# Altium PCB USB Wi-Fi.PcbDoc (part 1 of 2)
Units mm, origin at the board's own origin, x right, y up, seen from the top; angles counter-clockwise.
Board outline 24.6 x 61.64 mm, 2 copper layers (Top, Bottom), stack 1.535 mm thick; 80 components, 55 nets, 291 pads, 187 vias.
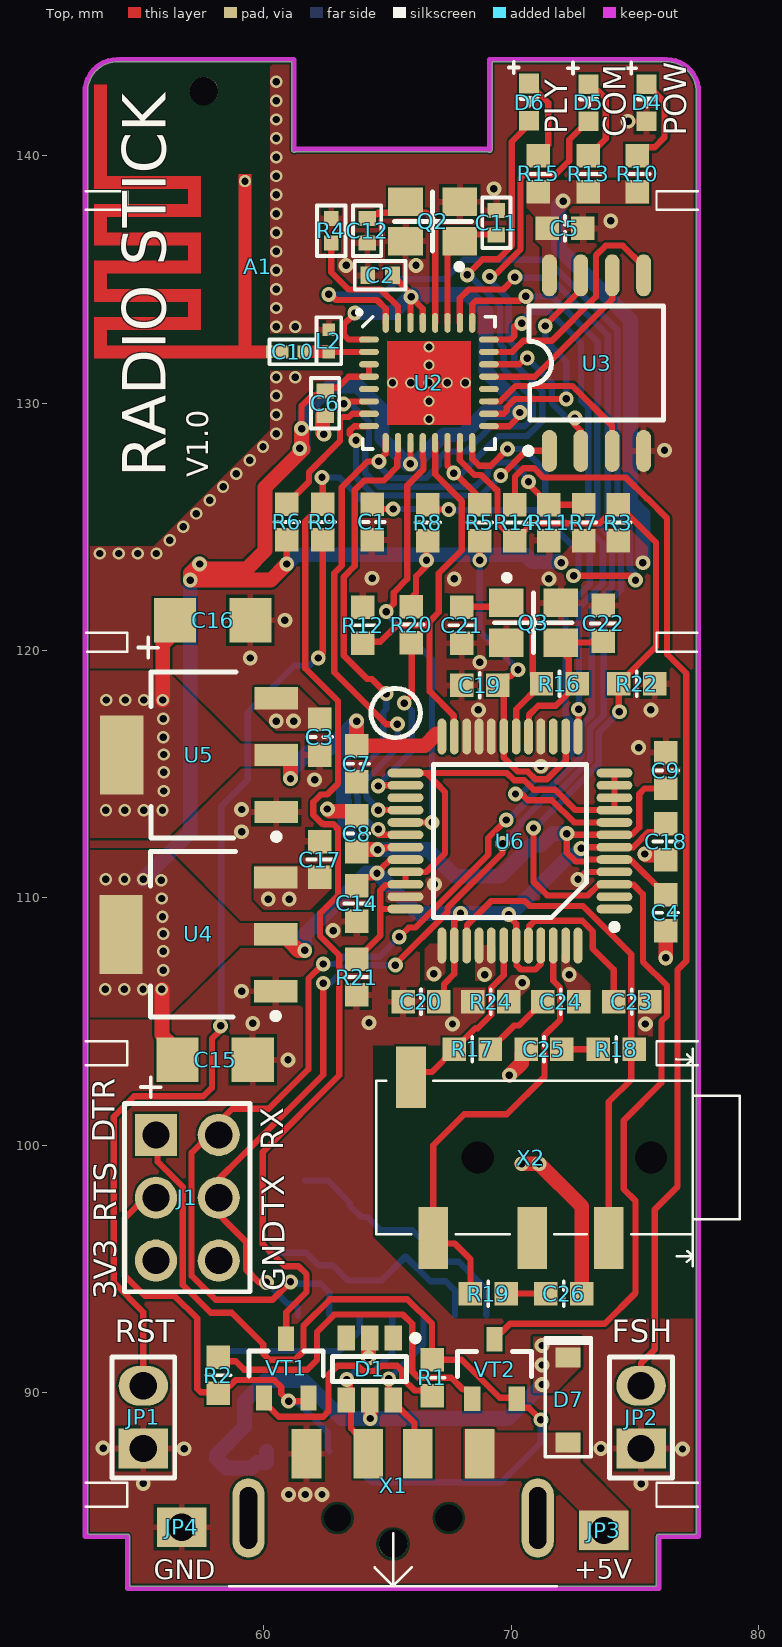
[diagram p0: Top view]
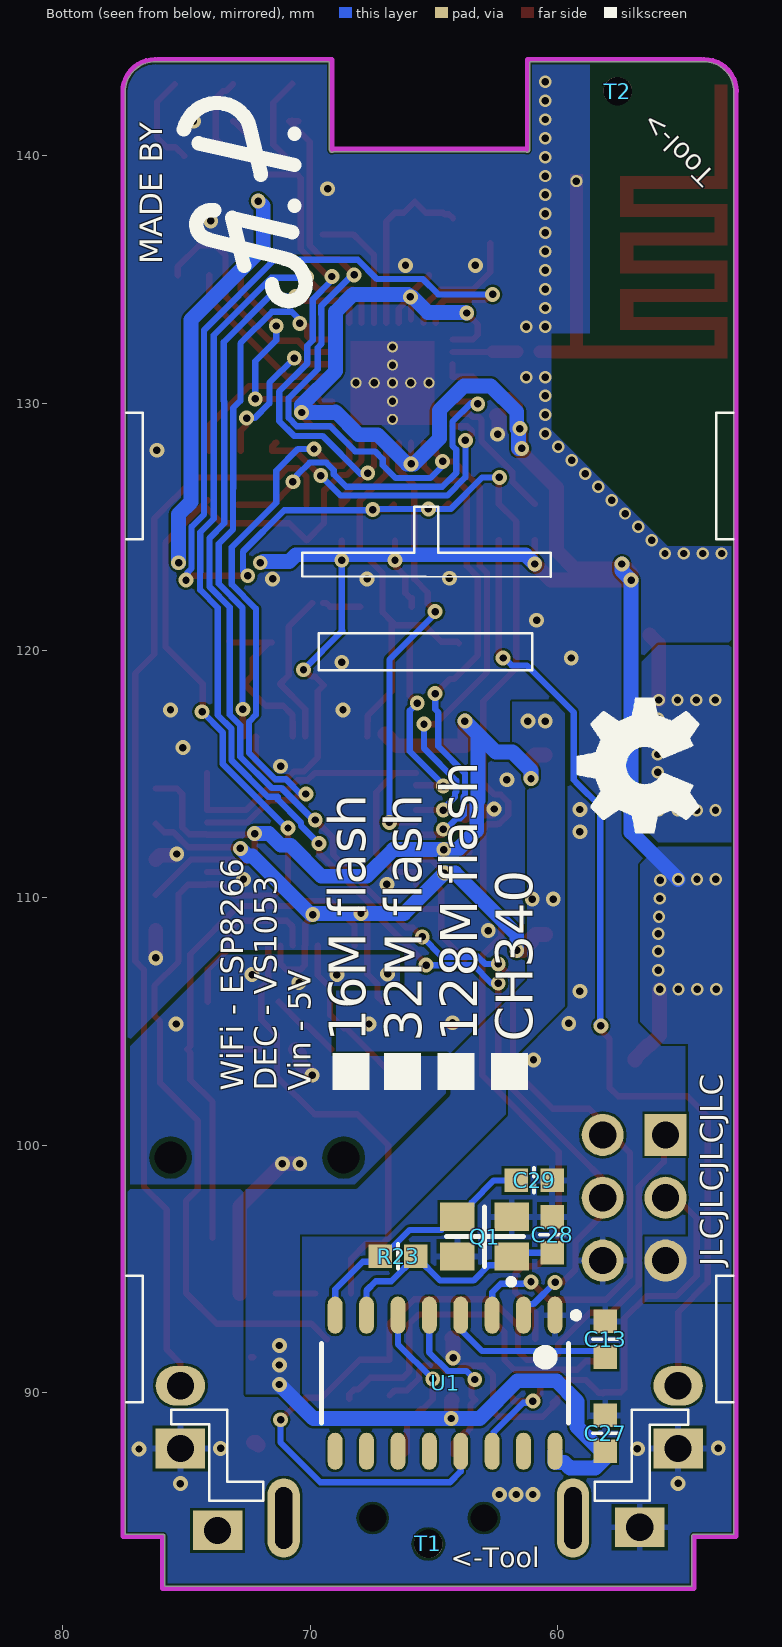
[diagram p1: Bottom view, seen from below]
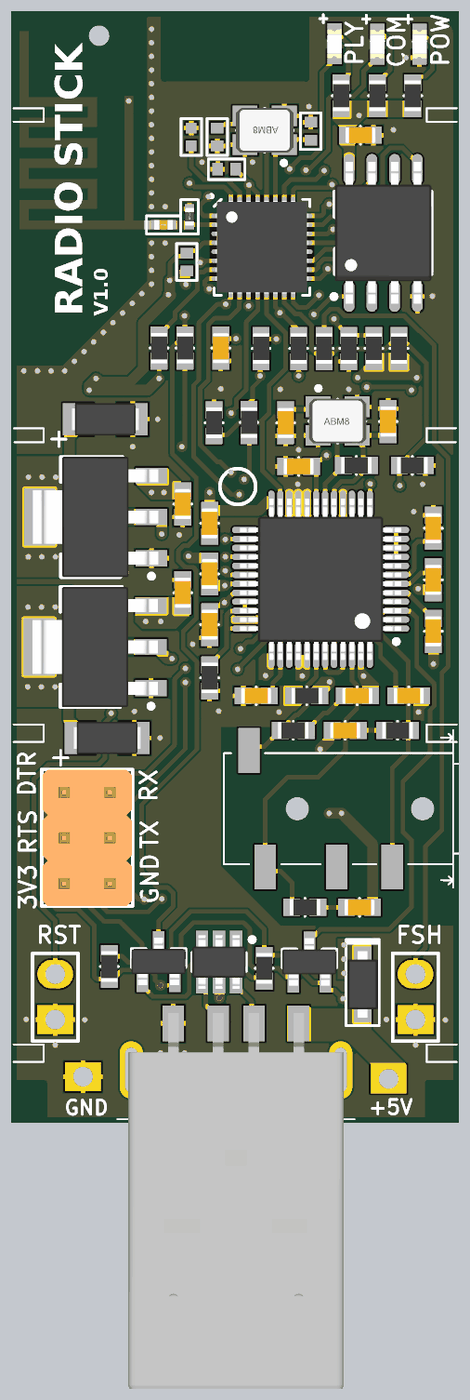
[diagram p3: 3D render of the assembled board from above, using the file's embedded part models]
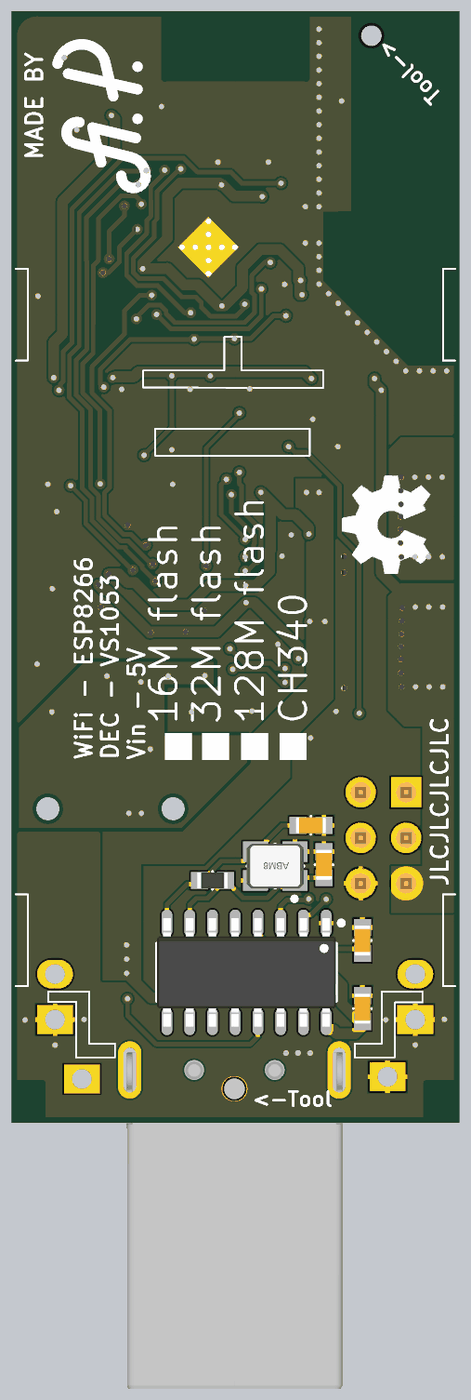
[diagram p4: 3D render of the assembled board from below, using the file's embedded part models]

## Layer stack, top to bottom
Top Solder: solder mask 0.0203, Solder Resist, Dk 3.8
Top: signal copper 0.035
Prepreg1: prepreg 0.2, PP-006, Dk 4.6
Core: dielectric 1.065, FR-4, Dk 4.6
Prepreg2: prepreg 0.2, PP-006, Dk 4.6
Bottom: signal copper 0.035
Bottom Solder: solder mask 0.0203, Solder Resist, Dk 3.8

## Board outline
52.875,84.275 54.475,84.275 cw(c54.475,84.175) 54.575,84.175 54.575,82.175 75.875,82.175 75.875,84.175 cw(c75.975,84.175) 75.975,84.275 77.475,84.275 77.475,142.696 ccw(c76.275,142.6) 76.275,143.803 cw(c76.275,143.904) 76.228,143.815 cw(c76.175,143.9) 76.175,143.8 69.225,143.8 69.225,140.25 cw(c69.125,140.25) 69.059,140.175 61.291,140.175 cw(c61.225,140.25) 61.125,140.25 61.125,143.8 54.175,143.8 cw(c54.175,143.9) 54.122,143.815 cw(c54.075,143.904) 54.075,143.803 ccw(c54.075,142.6) 52.875,142.696

## Design rules (kind name [scope] priority, off if disabled: settings)
Clearance PolyClearance [(InNamedPolygon('Bottom Layer4-AGND'))] p1: gap=0.2 ignorepadtopadclearanceinfootprint=TRUE
Clearance PadToPad [(InPadClass('All Pads')) vs (InPadClass('All Pads'))] p2: gap=0.127 ignorepadtopadclearanceinfootprint=TRUE
Clearance Ant [InComponent('A1') vs IsComponent] p3: gap=0 ignorepadtopadclearanceinfootprint=FALSE
Clearance [All] p4: gap=0.1 ignorepadtopadclearanceinfootprint=TRUE
ComponentClearance AntToOther [InComponent('A1','T1','T2')] p1: gap=0 collisioncheckmode=3 verticalgap=0 showdistances=FALSE
ComponentClearance [All] p2: gap=0.254 collisioncheckmode=3 verticalgap=0.254 showdistances=FALSE
HoleSize [All] p1: absolutevalues=TRUE maxlimit=6.3 minlimit=0.2 maxpercent=80.000 minpercent=20.000
MinimumSolderMaskSliver [All] p1: minsoldermaskwidth=0.2
PolygonConnect PolyToThermal [InComponent('C26','C25','U2','A1','U6','C23','C24','R24')] p1: connectstyle=Direct reliefconductorwidth=0.254 reliefentries=4 polygonreliefangle="90 Angle" airgapwidth=0.254
PolygonConnect PowerConnect [InNetClass('PowerNets')] p2: connectstyle=Direct reliefconductorwidth=0.254 reliefentries=4 polygonreliefangle="90 Angle" airgapwidth=0.254
PolygonConnect [All] p3: connectstyle=Relief reliefconductorwidth=0.254 reliefentries=4 polygonreliefangle="90 Angle" airgapwidth=0.127
RoutingVias [All] p1: holewidth=0.3 width=0.6 viastyle="Through Hole" minholewidth=0.3 minwidth=0.5 maxholewidth=6.3 maxwidth=0.6 useviatemplates=TRUE viatemplateguid#1={ECB47281-253E-4457-A08C-9E4C9EE73178} viatemplatename#1=ShieldingVia
ShortCircuit [InNet('NetA1_1') vs InNet('GND')] p1: allowed=TRUE
SilkToSilkClearance [All] p1: silktosilkclearance=0.1
SilkToSolderMaskClearance [IsPad] p1: minsilkscreentomaskgap=0.1 clearancetoexposedcopper=TRUE
SolderMaskExpansion [All] p1: expansion=0.1
Width [All] p1: maxlimit=0.6 minlimit=0.254 preferedwidth=0.254
24 further rules are at their usual default settings.

## Classes and differential pairs
net class PowerNets: 1v8 3v3A +5V NetD7_1

## Components (designator, comment, footprint, x,y, rotation, side; value= is the part's Value field where it differs from the comment)
A1 "AN91445" "MIFA 2.4GHZ" 65.33,131.821 r90 top
C1 "100n" "0603 CAP" 64.375,125.2 r90 top
C2 "1uF" 0402 64.7,135.175 r0 top
C3 "100n" "0603 CAP" 62.25,116.5 r90 top
C4 "100n" "0603 CAP" 76.25,109.4 r90 top
C5 "100n" "0603 CAP" 72.175,137.075 r0 top
C6 "1uF" 0402 62.475,130 r90 top
C7 "100n" "0603 CAP" 63.75,115.425 r90 top
C8 "100n" "0603 CAP" 63.75,112.6 r270 top
C9 "100n" "0603 CAP" 76.25,115.15 r270 top
C10 "5.6p" "CAP 0402" 61.175,132.075 r0 top
C11 "6.8p" 0402 69.4,137.3 r270 top
C12 "6.8p" 0402 64.175,136.975 r90 top
C13 "10n" "0603 CAP" 58.075,92.15 r270 bottom
C14 "100n" "0603 CAP" 63.75,109.775 r90 top
C15 "10uF" "CAP 1206" 58.025,103.45 r180 top
C16 "10uF" "CAP 1206" 57.925,121.225 r180 top
C17 "100n" "0603 CAP" 62.25,111.55 r270 top
C18 "100n" "0603 CAP" 76.25,112.275 r90 top
C19 "100n" "0603 CAP" 68.725,118.6 r0 top
C20 "100n" "0603 CAP" 66.35,105.8 r0 top
C21 "33p" "0603 CAP" 68,121.025 r90 top
C22 "33p" "0603 CAP" 73.725,121.1 r270 top
C23 "1uF" "0603 CAP" 74.875,105.8 r180 top
C24 "47nF" "0603 CAP" 72,105.8 r180 top
C25 "10n" "0603 CAP" 71.325,103.875 r0 top
C26 "10n" "0603 CAP" 72.125,94 r180 top
C27 "100n" "0603 CAP" 58.075,88.35 r270 bottom
C28 "22p" "0603 CAP" 60.225,96.375 r270 bottom
C29 "22p" "0603 CAP" 60.95,98.575 r0 bottom
D1 "SRV05-4-P-T7" SOT-23-6 64.275,90.95 r270 top
D4 "Red" "LED 0603" 75.475,142.15 r90 top
D5 "Blue" "LED 0603" 73.125,142.15 r90 top
D6 "Green" "LED 0603" 70.725,142.175 r90 top
D7 "B5819W" SOD-123 72.3,89.7 r270 top
J1 "HDR 2x3" "HDR 2X3 2.54MM" 55.635,100.415 r0 top
JP1 "R" HDR_FEM_1X2_2.54MM 55.125,87.735 r180 top
JP2 "F" HDR_FEM_1X2_2.54MM 75.25,87.735 r180 top
JP3 "+5V" HDR_FEM_1X1_2.54MM 73.75,84.425 r0 top
JP4 "GND" HDR_FEM_1X1_2.54MM 56.675,84.55 r0 top
L2 "NC" "IND 0402" 62.625,132.525 r270 top
Q1 "12MHZ" ABM8W 62.95,96.3 r0 bottom
Q2 "26MHZ" ABM8W 66.825,137.35 r180 top
Q3 "12.228MHZ" ABM8W 70.9,121.125 r0 top
R1 "12K" "0603 RES" 66.8,90.6 r90 top
R2 "12K" "0603 RES" 58.15,90.7 r270 top
R3 "12K" "0603 RES" 74.325,125.175 r90 top
R4 "12K" "0402 RES" 62.725,136.975 r90 top
R5 "12K" "0603 RES" 68.725,125.175 r90 top
R6 "12K" "0603 RES" 60.925,125.2 r90 top
R7 "100k" "0603 RES" 72.925,125.175 r270 top
R8 "12K" "0603 RES" 66.625,125.175 r90 top
R9 "470R" "0603 RES" 62.375,125.2 r90 top
R10 "1k" "0603 RES" 75.1,139.275 r270 top
R11 "100k" "0603 RES" 71.525,125.175 r90 top
R12 "12K" "0603 RES" 64,121.025 r270 top
R13 "1k" "0603 RES" 73.125,139.275 r90 top
R14 "470R" "0603 RES" 70.15,125.175 r90 top
R15 "1k" "0603 RES" 71.1,139.275 r90 top
R16 "1M" "0603 RES" 71.95,118.65 r0 top
R17 "22R" "0603 RES" 68.425,103.875 r180 top
R18 "22R" "0603 RES" 74.25,103.875 r0 top
R19 "22R" "0603 RES" 69.075,94 r180 top
R20 "100k" "0603 RES" 65.95,121.05 r90 top
R21 "100k" "0603 RES" 63.75,106.8 r90 top
R22 "100k" "0603 RES" 75.075,118.65 r180 top
R23 "1M" "0603 RES" 66.45,95.5 r0 bottom
R24 "0R" "0603 RES" 69.175,105.8 r0 top
T1 "Tooling hole" TOOLING 65.225,83.875 r180 bottom
T2 "Tooling hole" TOOLING 57.575,142.625 r180 bottom
U1 "CH340G" SOP-16 64.55,90.375 r270 bottom
U2 "ESP8266EX" "QFN-32 THERMAL" 66.675,130.825 r0 top
U3 "W25Q128JVSIQ" "SOIC-8 208-MIL" 73.45,131.625 r90 top
U4 "AMS1117-3.3" SOT233-3 57.35,108.525 r180 top
U5 "BL1117-18CX" SOT233-3 57.375,115.775 r180 top
U6 "VS1053B-L" LQFP-48 69.95,112.3 r180 top
VT1 "S8050" SOT-23 60.9,90.975 r90 top
VT2 "S8050" SOT-23 69.325,90.95 r90 top
X1 "480372100" USB2.0-A 65.225,84.925 r0 top
X2 "PJ-320D-X" "3.5MM JACK" 77.25,99.5 r180 top

## Footprints (in the part's own frame and the unit in brackets; to place one, negate y for a bottom-side part, rotate by r counter-clockwise, add the part's x,y. Pads: shape width x height; smd on the part's side, far side on the other; paste and mask are expansions set on the pad)
"3.5MM JACK" [mm]
  rect 1.2x2.5 smd: 1(11.3,-3.25) 2(3.3,3.25) 3(6.4,3.25) 4(10.4,3.25)
  round 0 hole 1.3 unplated paste+0 mask+0: ""(1.6,0) ""(8.6,0)
  silkscreen extent -2,-4.4 12.7,4.4, body extent -2,-3 12.6,3, height 5
0402 [mm] "Chip Capacitor, 2-Leads, Body 1.00x0.50mm, IPC Medium Density"
  rect 0.6x0.7 smd: 1(-0.5,0) 2(0.5,0)
  silkscreen extent -1.02,-0.58 1.02,0.58, body extent -0.53,-0.28 0.53,0.27, height 0.55
"0402 RES" [mm]
  rect 0.6x0.6 smd mask+0.1: 1(-0.5,0) 2(0.5,0)
  silkscreen extent -1.02,-0.58 1.02,0.58, body extent -0.53,-0.28 0.53,0.27, height 0.35
"0603 CAP" [mm]
  rect 0.95x0.95 smd: 1(-0.725,0) 2(0.725,0)
  silkscreen extent 0,-0.5 0,0.5, body extent -0.85,-0.45 0.85,0.45, height 0.9
"0603 RES" [mm]
  rect 0.95x0.95 smd: 1(-0.725,0) 2(0.725,0)
  silkscreen extent 0,-0.5 0,0.5, body extent -0.85,-0.45 0.85,0.45, height 0.55
ABM8W [mm] "4-Leads, Body 2.50x3.20mm, Pitch 2.20mm, IPC Medium Density"
  rect 1.4x1.15 smd: 1(-1.1,0.8) 2(1.1,0.8) 3(1.1,-0.8) 4(-1.1,-0.8)
  silkscreen extent -1.58,-1.2 1.55,1.86, body extent -1.6,-1.24 1.6,1.24, height 0.8
"CAP 0402" [mm]
  rect 0.52x0.52 smd mask+0.05: 1(-0.45,0) 2(0.45,0)
  silkscreen extent -0.95,-0.5 0.95,0.5, body extent -0.52,-0.28 0.52,0.28, height 0.56
"CAP 1206" [mm] "Molded Capacitor, 2-Leads, Body 3.20x1.60mm, IPC Medium Density"
  rect 1.7x1.8 smd: 1(1.525,0) 2(-1.525,0)
  silkscreen extent 2.2,0.7 3,1.51, body extent -1.92,-0.9 1.92,0.9, height 1.8
"HDR 2X3 2.54MM" [mm]
  rect 1.7x1.7 hole 1.1: 1(0,0)
  round 1.7 hole 1.1: 2(2.54,0) 3(0,-2.54) 4(2.54,-2.54) 5(0,-5.08) 6(2.54,-5.08)
  silkscreen extent -1.27,-6.34 3.81,1.27, body extent -1.23,-6.35 3.77,1.27, height 8.01
HDR_FEM_1X1_2.54MM [mm]
  rect 2x1.6 hole 1.1: 1(0,0)
HDR_FEM_1X2_2.54MM [mm]
  rect 2x1.6 hole 1.1: 1(0,0)
  oval 2x1.6 hole 1.1: 2(0,-2.54)
  silkscreen extent -1.27,-3.7 1.27,1.2
"IND 0402" [mm]
  rect 0.52x0.52 smd mask+0.05: 1(-0.45,0) 2(0.45,0)
  silkscreen extent -0.95,-0.5 0.95,0.5, body extent -0.5,-0.25 0.5,0.25, height 0.51
"LED 0603" [mm]
  rect 0.8x0.8 smd: 1(0.75,0) 2(-0.75,0)
  silkscreen extent -0.13,-0.33 1.63,0.82, body extent -0.8,-0.4 0.8,0.4, height 0.8
LQFP-48 [mm] "LQFP, 48-Leads, Body 7.00x7.00mm, Pitch 0.50mm, IPC Medium Density"
  oval 1.45x0.35 smd: 1(-4.225,2.75) 2(-4.225,2.25) 3(-4.225,1.75) 4(-4.225,1.25) 5(-4.225,0.75) 6(-4.225,0.25) 7(-4.225,-0.25) 8(-4.225,-0.75) 9(-4.225,-1.25) 10(-4.225,-1.75) 11(-4.225,-2.25) 12(-4.225,-2.75) 25(4.225,-2.75) 26(4.225,-2.25) 27(4.225,-1.75) 28(4.225,-1.25) 29(4.225,-0.75) 30(4.225,-0.25) 31(4.225,0.25) 32(4.225,0.75) 33(4.225,1.25) 34(4.225,1.75) 35(4.225,2.25) 36(4.225,2.75)
  oval 0.35x1.45 smd: 13(-2.75,-4.225) 14(-2.25,-4.225) 15(-1.75,-4.225) 16(-1.25,-4.225) 17(-0.75,-4.225) 18(-0.25,-4.225) 19(0.25,-4.225) 20(0.75,-4.225) 21(1.25,-4.225) 22(1.75,-4.225) 23(2.25,-4.225) 24(2.75,-4.225) 37(2.75,4.225) 38(2.25,4.225) 39(1.75,4.225) 40(1.25,4.225) 41(0.75,4.225) 42(0.25,4.225) 43(-0.25,4.225) 44(-0.75,4.225) 45(-1.25,4.225) 46(-1.75,4.225) 47(-2.25,4.225) 48(-2.75,4.225)
  silkscreen extent -4.35,-3.1 3.1,3.6, body extent -4.5,-4.5 4.5,4.5, height 1.85
"MIFA 2.4GHZ" [mm] "AN91445"
  rect 0.508x0.344 smd paste+0 mask+0: 1(0.254,5.08)
  round 0.5 hole 0.3: 2(7.164,6.094)
  Top region: 0,5.08 0.508,5.08 0.508,5.842 7.442,5.842 7.442,6.35 0.508,6.35 0.508,11.684 1.143,11.684 1.143,7.874 2.794,7.874 2.794,11.684 3.429,11.684 3.429,7.874 5.08,7.874 5.08,11.684 5.715,11.684 5.715,7.874 7.366,7.874 7.366,11.684 11.049,11.684 11.049,12.192 6.858,12.192 6.858,8.382 6.223,8.382 6.223,12.192 4.572,12.192 4.572,8.382 3.937,8.382 3.937,12.192 2.286,12.192 2.286,8.382 1.651,8.382 1.651,12.192 0,12.192
  Top region: -0.004,5.074
"QFN-32 THERMAL" [mm] "QFN, 32-Leads, Body 5.00x5.00mm, Pitch 0.50mm, Thermal Pad 3.70x3.70mm, IPC Medium Density"
  oval 0.8x0.25 smd mask+0.05: 1(-2.425,1.75) 2(-2.425,1.25) 3(-2.425,0.75) 4(-2.425,0.25) 5(-2.425,-0.25) 6(-2.425,-0.75) 7(-2.425,-1.25) 8(-2.425,-1.75) 17(2.425,-1.75) 18(2.425,-1.25) 19(2.425,-0.75) 20(2.425,-0.25) 21(2.425,0.25) 22(2.425,0.75) 23(2.425,1.25) 24(2.425,1.75)
  oval 0.25x0.8 smd mask+0.05: 9(-1.75,-2.425) 10(-1.25,-2.425) 11(-0.75,-2.425) 12(-0.25,-2.425) 13(0.25,-2.425) 14(0.75,-2.425) 15(1.25,-2.425) 16(1.75,-2.425) 25(1.75,2.425) 26(1.25,2.425) 27(0.75,2.425) 28(0.25,2.425) 29(-0.25,2.425) 30(-0.75,2.425) 31(-1.25,2.425) 32(-1.75,2.425)
  round 0.45 hole 0.3 mask+0: 33(-1.475,0) 33(-0.738,0) 33(0,-1.475) 33(0,-0.744) 33(0,0) 33(0,0.719) 33(0,1.45) 33(0.737,0) 33(1.475,0)
  Top region: -1.7,-1.7 1.7,-1.7 1.7,1.7 -1.7,1.7
  silkscreen extent -2.85,-2.68 2.68,2.87, body extent -2.57,-2.57 2.58,2.58, height 0.9
SOD-123 [mm] "SOD, 2-Leads, Body 1.60x3.70mm, IPC Medium Density"
  rect 0.8x1 smd: 1(1.72,0) 2(-1.72,0)
  silkscreen extent -2.5,-0.93 2.3,0.92, body extent -1.85,-0.85 1.85,0.85, height 3.25
"SOIC-8 208-MIL" [mm] "SOIC, 8-Leads, Body 5.28x5.28mm, Pitch 1.27mm, IPC Medium Density"
  oval 1.7x0.6 smd: 1(-3.55,1.905) 2(-3.55,0.635) 3(-3.55,-0.635) 4(-3.55,-1.905) 5(3.55,-1.905) 6(3.55,-0.635) 7(3.55,0.635) 8(3.55,1.905)
  silkscreen extent -3.67,-2.7 2.3,2.88, body extent -3.95,-2.7 3.95,2.7, height 2.16
SOP-16 [mm] "SOP, 16-Leads, Body 9.90x3.90mm, Pitch 1.27mm, IPC Medium Density"
  oval 1.5x0.6 smd: 1(-2.75,4.445) 2(-2.75,3.175) 3(-2.75,1.905) 4(-2.75,0.635) 5(-2.75,-0.635) 6(-2.75,-1.905) 7(-2.75,-3.175) 8(-2.75,-4.445) 9(2.75,-4.445) 10(2.75,-3.175) 11(2.75,-1.905) 12(2.75,-0.635) 13(2.75,0.635) 14(2.75,1.905) 15(2.75,3.175) 16(2.75,4.445)
  silkscreen extent -2.87,-5 1.6,5.42, body extent -3.03,-5 3.03,5, height 1.75
SOT233-3 [mm] "SOT223, 4-Leads, Body 6.50x7.00mm (avg), Pitch 2.30mm, IPC Medium Density"
  rect 1.75x0.9 smd: 1(-3.125,2.3) 2(-3.125,0) 3(-3.125,-2.3)
  rect 1.75x3.2 smd: 4(3.125,0)
  silkscreen extent -3.25,-3.35 1.94,3.42, body extent -3.5,-3.35 3.5,3.35, height 1.8
SOT-23 [mm] "SOT23, 3-Leads, Body 2.92x2.37mm, Pitch 0.90mm, IPC Medium Density"
  rect 1x0.65 smd: 1(-1.2,0.9) 2(-1.2,-0.9) 3(1.2,0)
  silkscreen extent -0.3,-1.5 0.7,1.5, body extent -1.32,-1.52 1.32,1.52, height 1.12
SOT-23-6 [mm] "SOT23, 6-Leads, Body 2.90x2.80mm, Pitch 0.95mm, IPC Medium Density"
  rect 1x0.7 smd mask+0.05: 1(-1.25,0.95) 2(-1.25,0) 3(-1.25,-0.95) 4(1.25,-0.95) 5(1.25,0) 6(1.25,0.95)
  silkscreen extent -1.37,-1.5 0.5,1.98, body extent -1.5,-1.5 1.5,1.5, height 1.45
TOOLING [mm]
  oval 1.152x1.125 hole 1.152 unplated paste+1.152 mask+0.148: 1(0,0)
USB2.0-A [mm]
  rect 1.2x2 smd: 1(3.5,2.6) 2(1,2.6) 3(-1,2.6) 4(-3.5,2.6)
  oval 1.3x3.2 hole 0.7 slot 2.5 at 90 deg paste+0 mask+0: 5(5.85,0) 6(-5.85,0)
  round 0 hole 1.1 unplated paste+0 mask+0: ""(-2.25,0) ""(2.25,0)
  silkscreen extent -6.63,-2.75 6.63,-0.63, body extent -6.02,-17.77 6.03,3.18, height 2.11

## Part data
A1: library part "MIFA 2.4GHz", ComponentLink1Description=rf-layout-guidelines, ComponentLink1URL=https://www.cypress.com/documentation/application-notes/an91445-antenna-design-and-rf-layout-guidelines
C1 C3 C4 C5 C7 C8 C9 C14 C17 C18 C19 C20 C27: library part CC0603KRX7R9BB104, "MULTILAYER CERAMIC CAPACITORS MLCC - SMD/SMT 100NF 50V 0603 ROHS", LCSC Part #=C14663, Manufacturer=YAGEO, Package=0603, Category=Capacitors, Datasheet=https://datasheet.lcsc.com/szlcsc/YAGEO-CC0603KRX7R9BB104_C14663.pdf, MFR.Part #=CC0603KRX7R9BB104
C2 C6: library part CL05A105KA5NQNC, "MULTILAYER CERAMIC CAPACITORS MLCC - SMD/SMT 1UF 25V 0402 ROHS", LCSC Part #=C52923, Manufacturer="Samsung Electro-Mechanics", Package=0402, Category=Capacitors, Datasheet=https://datasheet.lcsc.com/szlcsc/Samsung-Electro-Mechanics-CL05A105KA5NQNC_C52923.pdf, MFR.Part #=CL05A105KA5NQNC
C10: library part CL05B103KB5NNNC_1, "5.6PF ±0.25PF 50V C0G 0402 MULTILAYER CERAMIC CAPACITORS MLCC - SMD/SMT ROHS", LCSC Part #=C318596, Manufacturer="Samsung Electro-Mechanics", MFR.Part #=CL05C5R6CB5NNNC, Package=0402, Category=Capacitors, ComponentLink1Description=CL05C5R6CB5NNNC_C318596.pdf, ComponentLink1URL=https://datasheet.lcsc.com/szlcsc/1811131657_Samsung-Electro-Mechanics-CL05C5R6CB5NNNC_C318596.pdf, Datasheet=https://datasheet.lcsc.com/szlcsc/1811131657_Samsung-Electro-Mechanics-CL05C5R6CB5NNNC_C318596.pdf, Library Type=Extended
C11 C12: library part 0402CG6R8C500NT, "MULTILAYER CERAMIC CAPACITORS MLCC - SMD/SMT 6.8PF 50V 0402 ROHS", LCSC Part #=C1576, Manufacturer="Guangdong Fenghua Advanced Tech", Package=0402, Category=Capacitors, Datasheet=https://datasheet.lcsc.com/szlcsc/Guangdong-Fenghua-Advanced-Tech-0402CG6R8C500NT_C1576.pdf, MFR.Part #=0402CG6R8C500NT
C13 C25 C26: library part 0603B103K500NT, "MULTILAYER CERAMIC CAPACITORS MLCC - SMD/SMT 10NF 50V 0603 ROHS", LCSC Part #=C57112, Manufacturer="Guangdong Fenghua Advanced Tech", Package=0603, Category=Capacitors, Datasheet=https://datasheet.lcsc.com/szlcsc/Guangdong-Fenghua-Advanced-Tech-0603B103K500NT_C57112.pdf, MFR.Part #=0603B103K500NT
C15 C16: library part TAJA106K016RNJ, "TANTALUM CAPACITORS 10UF 16V CASE-A_3216 ROHS", LCSC Part #=C7171, Manufacturer=AVX, Package=CASE-A_3216, Category=Capacitors, Datasheet=https://datasheet.lcsc.com/szlcsc/AVX-TAJA106K016RNJ_C7171.pdf, MFR.Part #=TAJA106K016RNJ
C21 C22: library part CL10C330JB8NNNC, "MULTILAYER CERAMIC CAPACITORS MLCC - SMD/SMT 33PF 50V 0603 ROHS", LCSC Part #=C1663, Manufacturer="Samsung Electro-Mechanics", Package=0603, Category=Capacitors, Datasheet=https://datasheet.lcsc.com/szlcsc/Samsung-Electro-Mechanics-CL10C330JB8NNNC_C1663.pdf, MFR.Part #=CL10C330JB8NNNC
C23: library part CL10A105KB8NNNC, "MULTILAYER CERAMIC CAPACITORS MLCC - SMD/SMT 1UF 50V 0603 ROHS", LCSC Part #=C15849, Manufacturer="Samsung Electro-Mechanics", Package=0603, Category=Capacitors, Datasheet=https://datasheet.lcsc.com/szlcsc/Samsung-Electro-Mechanics-CL10A105KB8NNNC_C15849.pdf, MFR.Part #=CL10A105KB8NNNC
C24: library part CL10B473KB8NNNC, "MULTILAYER CERAMIC CAPACITORS MLCC - SMD/SMT 47NF 50V 0603 ROHS", LCSC Part #=C1622, Manufacturer="Samsung Electro-Mechanics", Package=0603, Category=Capacitors, Datasheet=https://datasheet.lcsc.com/szlcsc/Samsung-Electro-Mechanics-CL10B473KB8NNNC_C1622.pdf, MFR.Part #=CL10B473KB8NNNC
C28 C29: library part CL10C220JB8NNNC, "MULTILAYER CERAMIC CAPACITORS MLCC - SMD/SMT 22PF 50V 0603 ROHS", LCSC Part #=C1653, Manufacturer="Samsung Electro-Mechanics", Package=0603, Category=Capacitors, Datasheet=https://datasheet.lcsc.com/szlcsc/Samsung-Electro-Mechanics-CL10C220JB8NNNC_C1653.pdf, MFR.Part #=CL10C220JB8NNNC
D1: "TVS SOT-23-6 ROHS", LCSC Part #=C85364, Manufacturer="ProTek Devices", Package=SOT-23-6L, Category=Diodes, ComponentLink1Description=SRV05-4-P-T7_C85364, ComponentLink1URL=https://datasheet.lcsc.com/szlcsc/ProTek-Devices-SRV05-4-P-T7_C85364.pdf, Datasheet=https://datasheet.lcsc.com/szlcsc/ProTek-Devices-SRV05-4-P-T7_C85364.pdf, MFR.Part #=SRV05-4-P-T7
D4: library part KT-0603R, "LIGHT EMITTING DIODES (LED) RED 520~625NM 90~100MCD@20MA TOP VIEW 0603 ROHS", LCSC Part #=C2286, Manufacturer="Hubei KENTO Elec", Package=LED_0603, Category=LED's, Datasheet=https://datasheet.lcsc.com/szlcsc/Hubei-KENTO-Elec-KT-0603R_C2286.pdf, MFR.Part #=KT-0603R
D5: library part 19-217/BHC-ZL1M2RY/3T, "LIGHT EMITTING DIODES (LED) BLUE 465~475NM 11.5~28.5MCD@5MA TOP VIEW 0603 ROHS", LCSC Part #=C72041, Manufacturer="Everlight Elec", Package=LED_0603, Category=LED's, Datasheet=https://datasheet.lcsc.com/szlcsc/Everlight-Elec-19-217-BHC-ZL1M2RY-3T_C72041.pdf, MFR.Part #=19-217/BHC-ZL1M2RY/3T
D6: library part 19-217/GHC-YR1S2/3T, "LIGHT EMITTING DIODES (LED) GREEN 520~535NM 112~258MCD@20MA TOP VIEW 0603 ROHS", LCSC Part #=C72043, Manufacturer="Everlight Elec", Package=LED_0603, Category=LED's, Datasheet=https://datasheet.lcsc.com/szlcsc/Everlight-Elec-19-217-GHC-YR1S2-3T_C72043.pdf, MFR.Part #=19-217/GHC-YR1S2/3T
D7: "SCHOTTKY BARRIER DIODES (SBD) SOD-123 ROHS", LCSC Part #=C8598, Manufacturer="Changjiang Electronics Tech (CJ)", Package=SOD-123, Category=Diodes, Datasheet=https://datasheet.lcsc.com/szlcsc/Changjiang-Electronics-Tech-CJ-B5819W_C8598.pdf, MFR.Part #=B5819W
J1: library part 67997-106HLF, "CONN HEADER 6POS .100 STR 30AU", Color=Black, Current Rating=3A, Flammability Rating="UL94 V-0", Insulation Resistance=5GR, Manufacturer 1="Amphenol FCI", Max Operating Temperature=125°C, Max Voltage Rating (AC)=1.5kV, Min Operating Temperature=-65°C, Package Quantity=100, Supplier Part Number 1=609-3393-ND, Category="Headers and Wire Housings", ComponentLink1Description=https://datasheet.ciiva.com/5153/67996-222463-5153820.pdf?src-supplier=Mouser, ComponentLink1URL=https://datasheet.ciiva.com/5153/67996-222463-5153820.pdf?src-supplier=Mouser, ComponentLink2Description=https://datasheet.ciiva.com/16726/67996-16726286.pdf?src-supplier=Avnet+Europe, ComponentLink2URL=https://datasheet.ciiva.com/16726/67996-16726286.pdf?src-supplier=Avnet+Europe, ComponentLink3Description=https://datasheet.ciiva.com/722/67996-722044.pdf?src-supplier=Digi-Key, ComponentLink3URL=https://datasheet.ciiva.com/722/67996-722044.pdf?src-supplier=Digi-Key, ComponentLink4Description=https://datasheet.ciiva.com/10149/67996-10149221.pdf?src-supplier=Avnet, ComponentLink4URL=https://datasheet.ciiva.com/10149/67996-10149221.pdf?src-supplier=Avnet, ComponentLink5Description=https://datasheet.ciiva.com/46393/1876884-46393067.pdf?src-supplier=Element14, ComponentLink5URL=https://datasheet.ciiva.com/46393/1876884-46393067.pdf?src-supplier=Element14, Connector Type="Male Pin", Contact Gender=Male, Contact Material=Bronze, Contact Mating Length=0.23inch, Contact Plating=Gold,GXT, Contact Post Length=3.05mm, Depth=4.83mm, Gender=Male, Housing Color=Black, Housing Material=Thermoplastic, Lead Free="Lead Free", Length=7.62mm, Manufacturer Part Number 1=67997-106HLF, Mount="Through Hole", Number of Contacts=6, Number of Positions=6, Number of Rows=2, Orientation=Straight, Packaging=Bulk, Pitch=2.54mm, Pricing 1="1=1.78000, 10=1.61400, 100=1.38370, 500=1.15308, 1000=0.98835, 5000=0.87634, 10000=0.85657 (USD)", Radiation Hardening=No, REACH SVHC="No SVHC", RoHS=Yes, Row Spacing=0.1inch, Stock 1=1665, Supplier 1=Digi-Key, Termination="Through Hole", Voltage Rating=1.5kV
JP1 JP2: library part 68602-204HLF, "CONN HEADER VERT 2POS 2.54MM", Color=Black, Current Rating=3A, Flammability Rating="UL94 V-0", Insulation Resistance=5GR, Manufacturer 1="Amphenol FCI", Max Operating Temperature=125°C, Min Operating Temperature=-65°C, Package Quantity=100, Supplier Part Number 1=609-3369-ND, Voltage Rating=1.5kV, Category="Headers and Wire Housings", ComponentLink1Description=https://datasheet.ciiva.com/728/67996-728884.pdf?src-supplier=Digi-Key, ComponentLink1URL=https://datasheet.ciiva.com/728/67996-728884.pdf?src-supplier=Digi-Key, Connector Type="Male Pin", Contact Gender=Male, Contact Material=Bronze, Contact Mating Length=0.23inch, Contact Plating=Gold,GXT, Contact Post Length=3.81mm, Gender=Male, Housing Material=Thermoplastic, Manufacturer Part Number 1=68602-204HLF, Mount="Through Hole", Number of Contacts=4, Number of Positions=4, Number of Rows=2, Packaging=Bulk, Pitch=2.54mm, Pricing 1="1=0.34000, 10=0.31900, 100=0.22320, 500=0.19132, 1000=0.15943, 5000=0.13665, 10000=0.12754 (USD)", Radiation Hardening=No, RoHS=Yes, Row Spacing=0.1inch, Stock 1=139, Supplier 1=Digi-Key, Termination=Solder
JP3 JP4: library part 68602-101HLF, "CONN HEADER VERT 1POS 2.54MM", Color=Black, Current Rating=3A, Flammability Rating="UL94 V-0", Insulation Resistance=5GR, Manufacturer 1="Amphenol FCI", Manufacturer Part Number 1=68602-204HLF, Max Operating Temperature=125°C, Min Operating Temperature=-65°C, Package Quantity=100, Supplier Part Number 1=609-3369-ND, Voltage Rating=1.5kV, Category="Headers and Wire Housings", ComponentLink1Description=https://datasheet.ciiva.com/728/67996-728884.pdf?src-supplier=Digi-Key, ComponentLink1URL=https://datasheet.ciiva.com/728/67996-728884.pdf?src-supplier=Digi-Key, Connector Type="Male Pin", Contact Gender=Male, Contact Material=Bronze, Contact Mating Length=0.23inch, Contact Plating=Gold,GXT, Contact Post Length=3.81mm, Gender=Male, Housing Material=Thermoplastic, Mount="Through Hole", Number of Contacts=4, Number of Positions=4, Number of Rows=2, Packaging=Bulk, Pitch=2.54mm, Pricing 1="1=0.34000, 10=0.31900, 100=0.22320, 500=0.19132, 1000=0.15943, 5000=0.13665, 10000=0.12754 (USD)", Radiation Hardening=No, RoHS=Yes, Row Spacing=0.1inch, Stock 1=139, Supplier 1=Digi-Key, Termination=Solder
L2: library part "NC IND", "IND 0402 Matching"
Q1: library part X322512MSB4SI, "SMD CRYSTAL RESONATORS 12MHZ ±10PPM SMD-3225_4P ROHS", LCSC Part #=C9002, Manufacturer="Yangxing Tech", Package=SMD-3225_4P, Category=Crystals, ComponentLink1Description=X322512MSB4SI_C9002.pdf, ComponentLink1URL=https://datasheet.lcsc.com/szlcsc/Yangxing-Tech-X322512MSB4SI_C9002.pdf, Datasheet=https://datasheet.lcsc.com/szlcsc/Yangxing-Tech-X322512MSB4SI_C9002.pdf, MFR.Part #=X322512MSB4SI
Q2: library part X322526MEB4SC, "SMD CRYSTAL RESONATORS 26MHZ ±10PPM SMD-3225_4P ROHS", LCSC Part #=C23425, Manufacturer="Yangxing Tech", Package=SMD-3225_4P, Category=Crystals, Datasheet=https://datasheet.lcsc.com/szlcsc/Yangxing-Tech-X322526MEB4SC_C23425.pdf, MFR.Part #=X322526MEB4SC
Q3: library part X322512288MOB4SC, "SMD CRYSTAL RESONATORS 12.288MHZ ±10PPM SMD-3225_4P ROHS", LCSC Part #=C70567, Manufacturer="Yangxing Tech", Package=SMD-3225_4P, Category=Crystals, Datasheet=https://datasheet.lcsc.com/szlcsc/LCSC-X322512288MOB4SC_C70567.pdf, MFR.Part #=X322512288MOB4SC
R1 R2 R3 R5 R6 R8 R12: library part 0603WAF1202T5E, "CHIP RESISTOR - SURFACE MOUNT 12KOHMS ±1% 1/10W 0603 ROHS", LCSC Part #=C22790, Manufacturer="Uniroyal Elec", Package=0603, Category=Resistors, Datasheet=https://datasheet.lcsc.com/szlcsc/Uniroyal-Elec-0603WAF1202T5E_C22790.pdf, MFR.Part #=0603WAF1202T5E
R4: library part 0402WGF1202TCE, "CHIP RESISTOR - SURFACE MOUNT 12KOHMS ±1% 1/16W 0402 ROHS", LCSC Part #=C25752, Manufacturer="Uniroyal Elec", Package=0402, Category=Resistors, Datasheet=https://datasheet.lcsc.com/szlcsc/Uniroyal-Elec-0402WGF1202TCE_C25752.pdf, MFR.Part #=0402WGF1202TCE
R7 R11 R20 R21 R22: library part 0603WAF1003T5E, "CHIP RESISTOR - SURFACE MOUNT 100KOHMS ±1% 1/10W 0603 ROHS", LCSC Part #=C25803, Manufacturer="Uniroyal Elec", Package=0603, Category=Resistors, Datasheet=https://datasheet.lcsc.com/szlcsc/Uniroyal-Elec-0603WAF1003T5E_C25803.pdf, MFR.Part #=0603WAF1003T5E
R9 R14: library part 0603WAF4700T5E, "CHIP RESISTOR - SURFACE MOUNT 470OHMS ±1% 1/10W 0603 ROHS", LCSC Part #=C23179, Manufacturer="Uniroyal Elec", Package=0603, Category=Resistors, Datasheet=https://datasheet.lcsc.com/szlcsc/Uniroyal-Elec-0603WAF4700T5E_C23179.pdf, MFR.Part #=0603WAF4700T5E
R10 R13 R15: library part 0603WAF1001T5E, "CHIP RESISTOR - SURFACE MOUNT 1KOHMS ±1% 1/10W 0603 ROHS", LCSC Part #=C21190, Manufacturer="Uniroyal Elec", Package=0603, Category=Resistors, Datasheet=https://datasheet.lcsc.com/szlcsc/Uniroyal-Elec-0603WAF1001T5E_C21190.pdf, MFR.Part #=0603WAF1001T5E
R16 R23: library part 0603WAF1004T5E, "CHIP RESISTOR - SURFACE MOUNT 1MOHMS ±1% 1/10W 0603 ROHS", LCSC Part #=C22935, Manufacturer="Uniroyal Elec", Package=0603, Category=Resistors, Datasheet=https://datasheet.lcsc.com/szlcsc/Uniroyal-Elec-0603WAF1004T5E_C22935.pdf, MFR.Part #=0603WAF1004T5E
R17 R18 R19: library part 0603WAF220JT5E, "CHIP RESISTOR - SURFACE MOUNT 22OHMS ±1% 1/10W 0603 ROHS", LCSC Part #=C23345, Manufacturer="Uniroyal Elec", Package=0603, Category=Resistors, Datasheet=https://datasheet.lcsc.com/szlcsc/Uniroyal-Elec-0603WAF220JT5E_C23345.pdf, MFR.Part #=0603WAF220JT5E
R24: library part 0603WAF0000T5E, "CHIP RESISTOR - SURFACE MOUNT 0OHMS ±1% 1/10W 0603 ROHS", LCSC Part #=C21189, Manufacturer="Uniroyal Elec", Package=0603, Category=Resistors, Datasheet=https://datasheet.lcsc.com/szlcsc/Uniroyal-Elec-0603WAF0000T5E_C21189.pdf, MFR.Part #=0603WAF0000T5E
T1 T2: "For JLCPCB SMT Assembly"
U1: "USB 2MBPS 3.3V, 5V SOP-16_150MIL ROHS", LCSC Part #=C14267, Manufacturer="Jiangsu Qin Heng", Package=SOIC-16_3.9x9.9x1.27P, Category=IC's, Datasheet=https://datasheet.lcsc.com/szlcsc/Jiangsu-Qin-Heng-CH340G_C14267.pdf, MFR.Part #=CH340G
U2: "RF TRANSCEIVER ICS TXRX + MCU WIFI 802.11B/G/N/E/I 2.4GHZ 16DBM - 91DBM 2.5V~3.6V QFN-32_5X5X05P ROHS", LCSC Part #=C77967, Manufacturer="Espressif Systems", Package=QFN-32_EP_5.0x5.0x0.5P, Category=IC's, Datasheet=https://datasheet.lcsc.com/szlcsc/Espressif-Systems-ESP8266EX_C77967.pdf, Library Type=Extended, MFR.Part #=ESP8266EX
U3: "FLASH FLASH 128MB (16M X 8) SPI - DUAL/QUAD I/O SOIC-8_208MIL ROHS", LCSC Part #=C97521, Manufacturer="Winbond Elec", Package=SOIC-8_5.3x5.3x1.27P, Category=IC's, Datasheet=https://datasheet.lcsc.com/szlcsc/Winbond-Elec-W25Q128JVSIQTR_C97521.pdf, MFR.Part #=W25Q128JVSIQ
U4: "LOW DROPOUT REGULATORS(LDO) POSITIVE FIXED 1.3V @ 800MA 15V 3.3V 1A SOT-223 ROHS", LCSC Part #=C6186, Manufacturer="Advanced Monolithic Systems", Package=SOT-223, Category=IC's, ComponentLink1Description=AMS1117-3-3_C6186, ComponentLink1URL=https://datasheet.lcsc.com/szlcsc/1811201117_Advanced-Monolithic-Systems-AMS-AMS1117-3-3_C6186.pdf, Datasheet=https://datasheet.lcsc.com/szlcsc/1811201117_Advanced-Monolithic-Systems-AMS-AMS1117-3-3_C6186.pdf, MFR.Part #=AMS1117-3.3
U5: "LOW DROPOUT REGULATORS(LDO) POSITIVE FIXED 1.5V @ 1A 12V 1.8V 1A SOT-223 ROHS", LCSC Part #=C78971, Manufacturer="Shanghai Belling", Package=SOT-223, Category=IC's, Datasheet=https://datasheet.lcsc.com/szlcsc/Shanghai-Belling-BL1117-18CX_C78971.pdf, Library Type=Extended, MFR.Part #=BL1117-18CX
U6: "VIDEO-AUDIO INTERFACE ICS LQFP-48_7X7X05P ROHS", LCSC Part #=C9922, Manufacturer="VLSI Solution", Package=LQFP-48_7.0x7.0x0.5P, Category=IC's, Datasheet=https://datasheet.lcsc.com/szlcsc/VLSI-Solution-VS1053B_C9922.pdf, Library Type=Extended, MFR.Part #=VS1053B-L
VT1 VT2: "TRANSISTORS (NPN/PNP) NPN 500MA 25V SOT-23(SOT-23-3) ROHS", LCSC Part #=C2146, Manufacturer="Changjiang Electronics Tech (CJ)", Package=SOT-23-3, Category=Transistors, Datasheet=https://datasheet.lcsc.com/szlcsc/Changjiang-Electronics-Tech-CJ-S8050_C2146.pdf, MFR.Part #=S8050
X1: "USB - Type A Male USB 2 4 Through Hole USB Connectors RoHS", LCSC Part #=C136453, Manufacturer=MOLEX, Package="Through Hole", Category=Connectors, Datasheet=https://datasheet.lcsc.com/szlcsc/1811131824_MOLEX-480372100_C136453.pdf, MFR.Part #=480372100
X2: "3.5mm SMD Headphone Holder 4 Female Horizontal SMD Audio & Video Connectors RoHS", LCSC Part #=C319111, Manufacturer="XKB Enterprise", Package=SMD, Category=Connectors, ComponentLink1Description=PJ-320D-X, ComponentLink1URL=https://datasheet.lcsc.com/szlcsc/1810301445_XKB-Enterprise-PJ-320D-X_C319111.pdf, Datasheet=https://datasheet.lcsc.com/szlcsc/1810301445_XKB-Enterprise-PJ-320D-X_C319111.pdf, MFR.Part #=PJ-320D-X

## Via types
v1: diameter 0.6, hole 0.3, Top to Bottom, tented both sides, 129 vias
v2: diameter 0.5, hole 0.3, Top to Bottom, tented both sides, 58 vias

## Nets (pads, with @x,y where several pads share a name; then routed paths per layer and width w, separated by ;. In a path a pad name is that pad's centre, name@x,y a point inside that pad or via, vN(x,y) a via of type N, cw(c..) or ccw(c..) an arc to the next point about the centre after c; other vN are vias at no path point)
1v8: C4.2 C7.2 C8.2 C9.2 C16.1 U5.2 U5.4 U6.5 U6.7 U6.24 U6.31 | length 40
  Top w0.254: v1(64.6,111.95) 64.624,111.974 64.874,111.974 64.95,112.05 U6.31@65.725,112.05 ; v1(72.25,112.6) v1@72.25,112.55 ; C4.2@76.25,110.125 74.825,111.55 U6.5@74.175,111.55 73.12,111.55 73.043,111.473 72.607,111.473 72.25,111.83 v1@72.25,112.55 ; C9.2@76.25,114.425 75.4,114.425 75.175,114.2 75.175,112.85 74.893,112.568 74.193,112.568 U6.7@74.175,112.55 v1@72.25,112.55
  Top w0.6: v2(55.912,118) 55.912,120.262 C16.1@56.275,120.625 ; U5.2@60.5,115.775 60.925,115.775 61.075,115.625 v1(61.075,114.825) ; C8.2@63.75,111.875 63.825,111.95 v1(64.6,111.95) ; v1(63.75,117.15) C7.2@63.75,116.15 66.5,116.15 66.975,116.625
  Bottom w0.6: v1(61.075,114.825) 61.075,115.15 61.825,115.9 62.5,115.9 63.217,116.617 ; v1(63.75,117.15) 63.217,116.617 ; v1(72.25,112.6) 71.665,112.6 71.19,112.125 70.8,112.125 69.55,110.875 67.725,110.875 66.65,111.95 v1(64.6,111.95) 64.048,111.95 63.269,112.729 63.269,113.884 63.217,113.936 63.217,116.617
  other v2: 53.613,113.55 54.375,113.55 55.137,113.55 55.899,113.55 55.95,114.323 55.95,115.085 55.95,115.799 55.925,116.488 55.925,117.25 53.626,118 54.388,118 55.15,118
3v3A: C2.2 C5.1 C6.2 C14.2 C15.1 C18.2 C19.2 C20.2 J1.5 R3.1 R5.1 R6.1 R7.2 R8.1 R10.2 R13.1 R15.1 R20.2 U2.1 U2.3 U2.4 U2.11 U2.17 U2.29 U2.30 U3.8 U4.2 U4.4 U6.6 U6.14 U6.19 U6.32 U6.38 U6.43 U6.45 | length 143
  Top w0.254: v1@60.875,123.45 v1(60.925,123.5) R6.1@60.925,124.475 ; v1(61.525,128.975) 61.525,129.9 61.952,130.327 62.252,130.327 62.425,130.5 C6.2@62.475,130.5 ; C6.2@62.6,130.5 62.728,130.628 62.978,130.628 63.425,131.075 U2.4@64.25,131.075 U2.3@64.25,131.575 ; v1@63.625,133.469 63.505,133.469 63.225,133.188 63.225,132.775 63.425,132.575 U2.1@64.25,132.575 ; C14.2@63.75,110.5 64.078,110.828 64.403,110.828 v1(64.575,111) 64.706,111.131 64.706,111.149 64.752,111.196 64.773,111.196 64.773,111.217 65.084,111.528 65.127,111.528 65.149,111.55 U6.32@65.725,111.55 ; C2.2@65.2,135.175 65.2,135.125 65.373,134.952 65.423,134.952 65.925,134.45 65.925,134.3 U2.30@65.925,133.4 ; R20.2@65.9,121.775 65.9,122.123 65.947,122.123 66.154,122.33 66.154,123.004 66.575,123.425 v1(66.575,123.65) R8.1@66.575,124.45 ; v1@65.925,127.725 U2.11@65.925,128.4 ; v1(65.95,134.3) 66.425,133.825 U2.29@66.425,133.25 ; C20.2@67.075,105.8 67.282,106.007 67.282,106.507 67.7,106.925 U6.38@67.7,108.075 67.7,109.066 67.95,109.316 v1(67.95,109.375) ; v1@68.725,123.525 v1(68.725,123.65) R5.1@68.725,124.45 ; U2.17@69.1,129.075 69.925,129.075 70.35,129.5 v1(70.35,129.625) ; v1(69.9,109.325) 69.9,109.25 70.2,108.95 U6.43@70.2,108.075 70.218,108.057 70.218,107.279 70.395,107.102 70.976,107.102 71.2,107.326 U6.45@71.2,108.075 ; v1(70.275,119.225) 70.23,119.225 69.953,118.948 69.798,118.948 C19.2@69.45,118.6 69.7,118.35 U6.19@69.7,116.525 69.7,115.675 70.268,115.107 70.673,115.107 70.982,114.798 71.448,114.798 72.2,115.55 U6.14@72.2,116.525 U6.14@72.182,116.507 ; v1(72.825,112) 72.875,112.05 U6.6@74.175,112.05 74.93,112.05 75.532,112.652 75.902,112.652 C18.2@76.25,113
  Top w0.6: v2(55.874,106.3) 55.874,104.451 56.275,104.05 56.325,104.05 56.875,103.5 C15.1@56.875,103.45 ; U4.2@60.475,108.525 60.9,108.525 61.05,108.375 61.05,108.226 61.401,107.875 v1(61.65,107.875) ; v1@60.875,123.45 60.275,122.85 v1(57.025,122.85) 57.025,123.125 v1(57.4,123.5) 57.6,123.3 59.3,123.3 60.05,124.05 60.05,126.6 61.575,128.125 v1@61.575,128.175 ; v1(61.45,128.175) 61.525,128.25 v1(61.525,128.975)
  Bottom w0.254: v1(68.725,123.65) 68.725,120.825 68.7,120.8 v1(70.275,119.225)
  Bottom w0.6: v2(55.125,110.75) 57.025,112.65 v1(57.025,122.85) 57.4,123.225 v1(57.4,123.5) ; v1(60.925,123.5) 61.3,123.875 70.575,123.875 70.85,123.6 v1@71.9,123.6 ; v1@61.575,128.175 v1@61.575,128.9 ; v1@61.575,129.05 v1@61.575,128.9 ; v1(61.65,107.875) 61.65,108.515 64.135,111 v1(64.575,111) 66.2,109.375 v1(67.95,109.375) 69.85,109.375 v1(69.9,109.325) 69.965,109.325 72.34,111.7 72.525,111.7 v1(72.825,112) ; v1(63.675,133.65) 63.7,133.65 63.725,133.675 65.25,133.675 65.875,134.3 v1(65.95,134.3) 66.05,134.4 68.275,134.4 68.975,133.7 68.975,131.3 70.348,129.927 70.348,129.627 v1(70.35,129.625) 69,129.625 68.975,129.65 68.05,128.725 67.275,128.725 66.1,127.55 v1(65.925,127.55) 65.8,127.55 64.779,128.571 64.779,129.711 63.79,130.7 62.7,130.7 61.65,129.65 61.65,128.975 v1@61.575,128.9 ; v1(72.1,138.175) 71.9,137.975 71.9,136.3 74.825,133.375 74.825,126.01 75.325,125.51 v1(75.325,123.55)
  other v1: 72.025,123.55
  other v2: 53.588,106.3 54.35,106.3 55.112,106.3 55.925,107.073 55.925,107.835 55.925,108.549 55.9,109.238 55.875,109.975 55.85,110.712 53.601,110.75 54.363,110.75
+5V: C3.2 C17.2 C27.2 D1.5 D7.2 U1.16 U4.3 U5.3 | length 19.9
  Top w0.254: D7.2@72.3,91.42 D7.2@72.4,91.42
  Top w0.6: D1.5@64.275,89.7 64.3,89.675 v1(64.3,88.95)
  Bottom w0.6: U1.16@60.105,87.625 60.105,87.175 59.725,87.175 59.5,86.95 58.475,86.95 58.075,87.35 58.075,87.475 59.213,88.612 59.213,89.637 60.05,90.475 61.625,90.475 63.15,88.95 v1(64.3,88.95) 69.875,88.95 v1(71.25,90.325)
  other v1: 71.25,91.113 71.25,91.9 60.175,109.95 61.025,109.95 60.5,117.15 61.2,117.15
ADC: R7.1 R11.2 U2.6 | length 15.1
  Top w0.254: v1(63.225,129.975) 63.425,129.975 63.5,130.05 63.475,130.075 U2.6@64.25,130.075 ; v1@70.85,126.825 v1(70.7,126.825) 70.766,126.759 70.766,126.659 R11.2@71.525,125.9 R7.1@72.925,125.9
  Bottom w0.254: v1(63.225,129.975) 63.472,129.975 63.5,130.003 64.252,129.251 64.252,128.282 64.098,128.128 64.098,127.182 64.659,126.621 68.546,126.621 69.048,127.123 69.048,127.293 69.357,127.602 70.029,127.602 70.527,127.104 70.527,127.092 70.7,126.919 v1(70.7,126.825)
AGND: C23.1 C24.1 C25.1 C26.1 R24.2 U6.37 U6.40 U6.41 U6.47 | length 8
  Top w0.6: v1(69.925,102.825) 70.425,103.325 70.425,103.7 C25.1@70.6,103.875 ; v1(70.425,99.25) v1(71.125,99.25) 72.85,97.525 C26.1@72.85,94
  other v1: 75.425,104.9 70.45,106.575 68.925,106.9 72.35,106.9 66.875,106.925
CN-PD: R6.2 U2.7 | length 5.6
  Top w0.254: R6.2@60.925,125.925 61.823,126.823 61.823,127.218 63.075,128.47 63.075,129.325 63.198,129.448 63.443,129.448 63.57,129.575 U2.7@64.25,129.575
DTR: J1.1 R1.2 U1.13 VT2.2 | length 36.9
  Top w0.254: J1.1@55.635,100.415 55.7,100.35 55.7,99.333 56.721,98.312 56.721,94.35 57.846,93.225 58.7,93.225 59.975,91.95 59.975,91.575 60.225,91.325 61.25,91.325 61.6,91.675 61.6,92.7 62.675,93.775 65.8,93.775 66.8,92.775 R1.2@66.8,91.325 67.996,91.325 69.535,89.786 70.189,89.786 VT2.2@70.225,89.75 70.225,89.583 70.423,89.385 70.715,89.385 v1(71.2,88.9)
  Bottom w0.254: U1.13@63.915,87.625 63.915,86.81 64.35,86.375 69.6,86.375 71.2,87.975 v1(71.2,88.9)
GB: R17.2 U6.42 X2.1 | length 7.3
  Top w0.254: X2.1@65.95,102.75 66.157,102.957 66.782,102.957 R17.2@67.7,103.875 68.552,104.727 68.648,104.727 69.198,105.277 69.198,106.369 69.7,106.871 U6.42@69.7,108.075